# EAGLE board damp_orig (EAGLE 6.4)
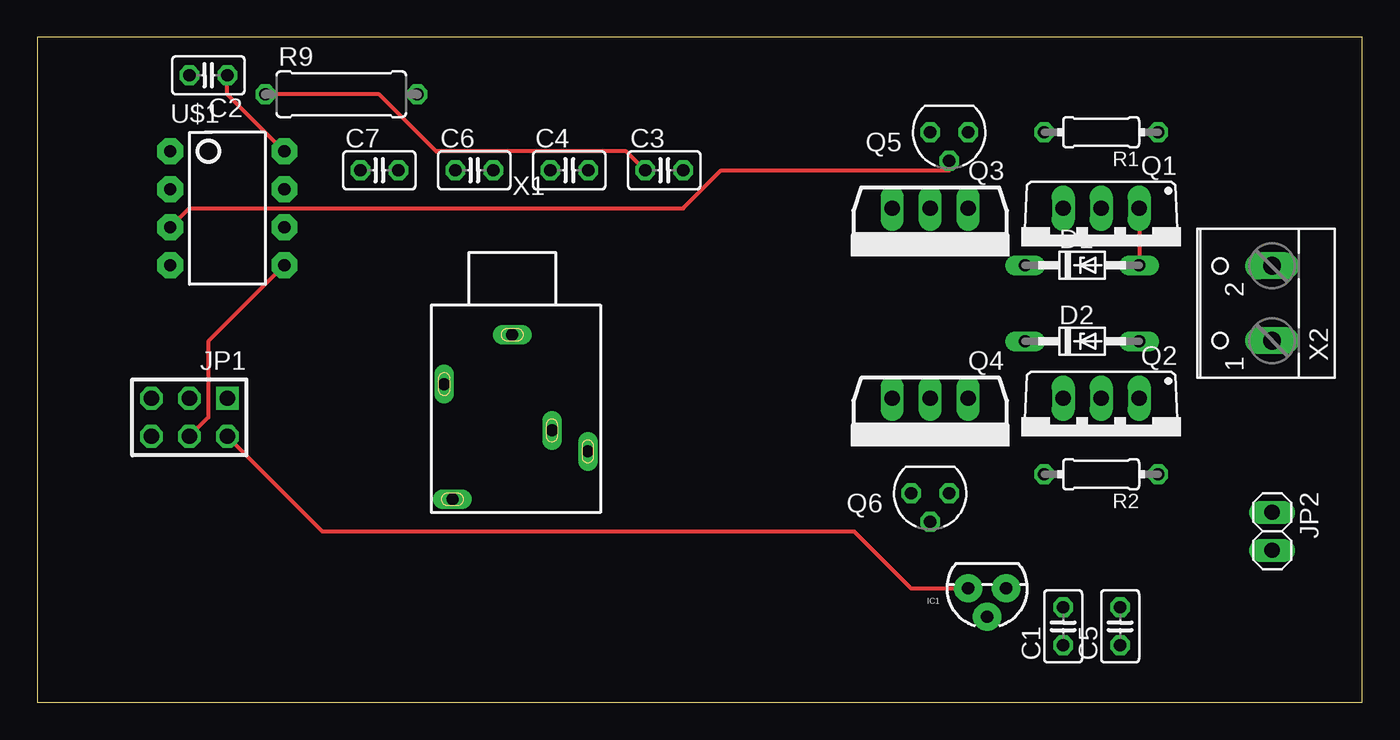
[diagram p0: board, top side]
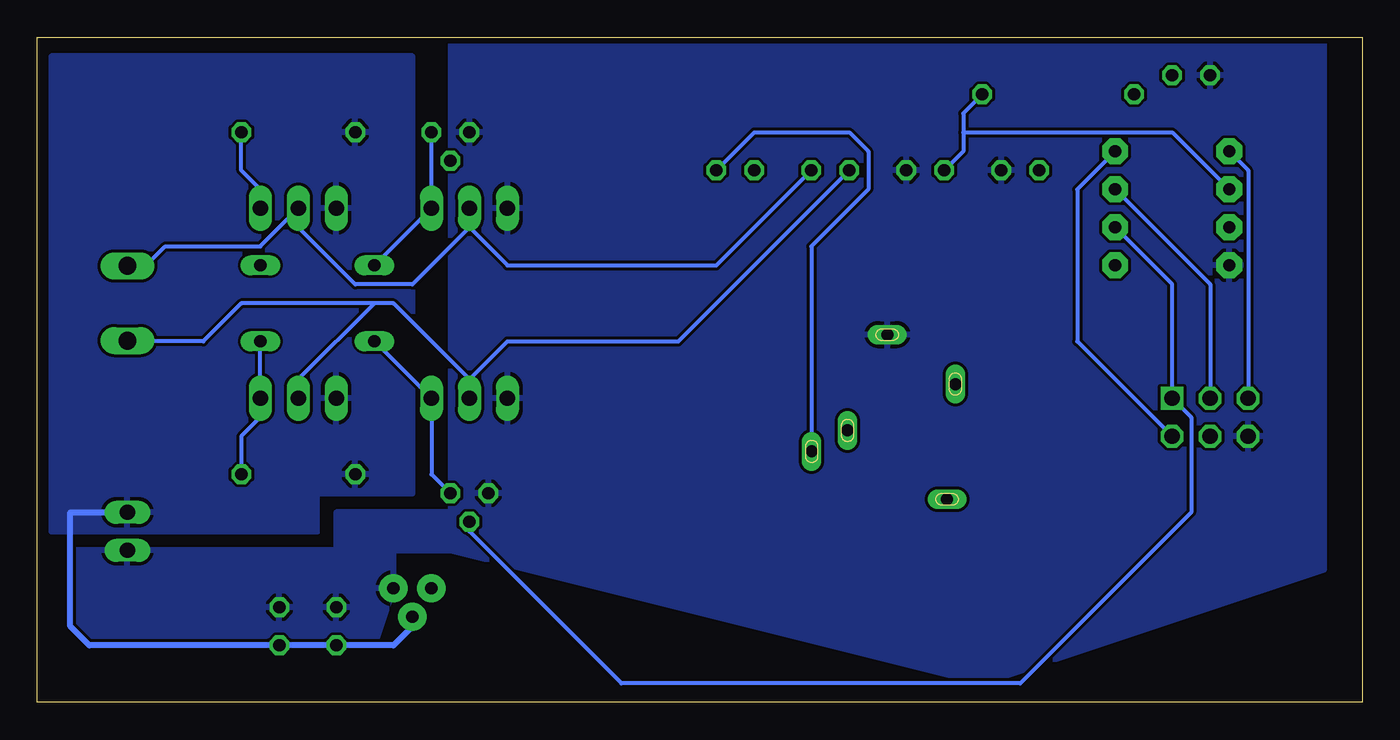
[diagram p1: board, bottom side, seen from below]

Size 88.57 x 44.44 mm. Coordinates in mm from the lower left corner, seen from the top.
Outline: 0,0 88.57,0 88.57,44.44 0,44.44 0,0
Copper layers (1*16): Top 0.035mm / dielectric 1.5mm / Bottom 0.035mm
Design rules "default *": minimum track width 10mil, minimum drill 24mil, track to track 0.2mm, track to pad 0.2mm, pad to pad 0.2mm, via to via 0.2mm, smd to smd 0.2mm, copper to edge 0.4mm, drill to drill 0.4mm, minimum pad ring 10mil, minimum via ring 8mil, stop-mask expansion 4mil, vias tented up to drill 0mil, thermal gap 10mil
Net classes: 1 Power: width 0.508 mm

## Footprints (pad centres in the part's own frame; a part is rotated, then mirrored left to right if it is on the bottom)
C025-025X050 = drill 0.813 octagon: 1 -1.27,0; 2 1.27,0
DO34Z7 = drill 0.813 long: A 3.81,0; C -3.81,0
TO-92 = drill 0.813 pad 1.88: 1 -1.27,0; 2 0,1.905; 3 1.27,0
AVR-ISP-6 = drill 1.016 square: 1 -2.54,-1.27 | drill 1.016 octagon: 2 -2.54,1.27; 3 0,-1.27; 4 0,1.27; 5 2.54,-1.27; 6 2.54,1.27
1X02 = drill 1.016 long: 1 -1.27,0; 2 1.27,0
TO220BV = drill 1.016 long: D 0,-2.54; G -2.54,-2.54; S 2.54,-2.54
TO262-V = drill 1.016 long: 1 -2.54,0; 2 0,0; 3 2.54,0
SOT54E = drill 0.813 octagon: D -1.27,0; G 0,1.905; S 1.27,0
0204/7 = drill 0.813 octagon: 1 -3.81,0; 2 3.81,0
0309/10 = drill 0.813 octagon: 1 -5.08,0; 2 5.08,0
DIP08 = drill 0.813 pad 1.727 octagon: 1 -3.81,-3.81; 2 -1.27,-3.81; 3 1.27,-3.81; 4 3.81,-3.81; 5 3.81,3.81; 6 1.27,3.81; 7 -1.27,3.81; 8 -3.81,3.81
1503_09 = drill 0.8 pad 1.2 long: 1 0,-2.1; 2 -4.55,-5.4; 3 5.05,-9.9; 4 -4,-13.1; 5 2.65,-8.5
W237-102 = drill 1.194 long: 1 -2.5,-1.27; 2 2.5,-1.27

## Placement (x,y rotation side)
C1  100nF  [C025-025X050]  68.58,5.08 90 top
C2  100nF  [C025-025X050]  11.43,41.91 180 top
C3  10uF  [C025-025X050]  41.91,35.56 0 top
C4  47nF  [C025-025X050]  35.56,35.56 0 top
C5  330uF  [C025-025X050]  72.39,5.08 90 top
C6  1nF  [C025-025X050]  29.21,35.56 0 top
C7  47nF  [C025-025X050]  22.86,35.56 0 top
D1  BZX90  [DO34Z7]  69.85,29.21 0 top
D2  BZX90  [DO34Z7]  69.85,24.13 0 top
IC1  78L33 or 7805  [TO-92]  63.5,7.62 180 top
JP1  AVR-ISP-6VERT  [AVR-ISP-6]  10.16,19.05 180 top
JP2  [1X02]  82.55,11.43 270 top
Q1  IRF9Z14  [TO220BV]  71.12,30.48 180 top
Q2  IRF9Z14  [TO220BV]  71.12,17.78 180 top
Q3  IRFZ14  [TO262-V]  59.69,33.02 180 top
Q4  IRFZ14  [TO262-V]  59.69,20.32 180 top
Q5  BS170  [SOT54E]  60.96,38.1 180 top
Q6  BS170  [SOT54E]  59.69,13.97 180 top
R1  1k  [0204/7]  71.12,38.1 180 top
R2  1k  [0204/7]  71.12,15.24 180 top
R9  10k  [0309/10]  20.32,40.64 0 top
U$1  ATTINY45DIP8  [DIP08]  12.7,33.02 270 top
X1  1503_09  [1503_09]  31.75,26.67 0 top
X2  [W237-102]  81.28,26.67 90 top

## Library data of the parts
C1-C7 R1 R2 R9 = rcl
D1 D2 = diode
IC1 U$1 = SparkFun
JP1 = avr-7
JP2 = pinhead
Q1-Q4 = transistor-power
Q5 Q6 = transistor-small-signal
X1 = con-lumberg
X2 = con-wago-500; MPN: 237-102; OC_FARNELL: unknown; OC_NEWARK: 70K9898

## Nets
+12V: C1.1 C5.1 IC1.2 JP2.1 Q1.S Q2.S R1.2 R2.2
GND: C1.2 C2.2 C5.2 C6.2 C7.2 IC1.1 JP1.6 JP2.2 Q3.3 Q4.3 Q5.S Q6.S U$1.4 X1.1
N$1: D1.A Q1.G R1.1
N$2: D2.A Q2.G R2.1
N$3: C4.2 Q1.D Q3.2 X2.2
N$4: JP1.5 U$1.1
N$5: C4.1 Q2.D Q4.2 X2.1
N$7: D1.C Q3.1 Q5.D
N$8: D2.C Q4.1 Q6.D
N$10: C6.1 R9.2 U$1.2
N$11: JP1.4 U$1.5
N$12: C2.1 IC1.3 JP1.2 U$1.8
N$13: JP1.1 Q6.G U$1.6
N$14: JP1.3 U$1.7
N$15: C3.1 R9.1
N$18: Q5.G U$1.3
N$19: C7.1
N$23: C3.2 X1.3

## Tracks (layer width: path | path; a pad name or v marks a point on that pad's centre or on a via)
+12V
  Bottom 0.406: IC1.2 63.5,5.08 64.77,3.81 C1.1 C5.1 85.09,3.81 86.36,5.08 86.36,12.7 JP2.1
  pour Bottom: 63.5,43.18 87.63,43.18 87.63,11.43 69.85,11.43 69.85,13.97 63.5,13.97
GND
  pour Bottom: 2.54,77.47 60.96,44.45 60.96,12.7 68.58,12.7 68.58,10.16 86.36,10.16 86.36,3.81 66.04,3.81 64.77,7.62 64.77,10.16 60.96,10.16 25.4,1.27 2.54,8.89
N$1
  Top 0.254: Q1.G D1.A
  Bottom 0.254: R1.1 74.93,35.56 73.66,34.29 Q1.G
N$2
  Bottom 0.254: R2.1 74.93,17.78 73.66,19.05 Q2.G D2.A
N$3
  Bottom 0.254: X2.2 82.55,29.21 81.28,29.21 80.01,30.48 73.66,30.48 Q1.D 71.12,31.75 67.31,27.94 63.5,27.94 59.69,31.75 | C4.2 43.18,29.21 57.15,29.21 59.69,31.75 | 59.69,31.75 Q3.2
N$4
  Bottom 0.254: JP1.5 7.62,35.56 U$1.1
N$5
  Bottom 0.254: C4.1 45.72,24.13 57.15,24.13 59.69,21.59 | Q2.D 71.12,21.59 66.04,26.67 | 66.04,26.67 64.77,26.67 59.69,21.59 | 59.69,21.59 Q4.2 | 66.04,26.67 74.93,26.67 77.47,24.13 82.55,24.13 X2.1
N$7
  Bottom 0.254: D1.C Q3.1 Q5.D
N$8
  Bottom 0.254: Q6.D 62.23,15.24 Q4.1 D2.C
N$10
  Bottom 0.254: C6.1 26.67,36.83 26.67,38.1 | 26.67,38.1 26.67,39.37 R9.2 | U$1.2 12.7,38.1 26.67,38.1
N$11
  Top 0.254: JP1.4 11.43,19.05 11.43,24.13 U$1.5
N$12
  Top 0.254: C2.1 12.7,40.64 U$1.8 | IC1.3 58.42,7.62 54.61,11.43 19.05,11.43 JP1.2
  Bottom 0.254: JP1.2 19.05,24.13 19.05,34.29 U$1.8
N$13
  Bottom 0.254: Q6.G 59.69,11.43 49.53,1.27 22.86,1.27 11.43,12.7 11.43,19.05 JP1.1 12.7,27.94 U$1.6
N$14
  Bottom 0.254: JP1.3 10.16,27.94 U$1.7
N$15
  Top 0.254: R9.1 22.86,40.64 26.67,36.83 39.37,36.83 C3.1
N$18
  Top 0.254: U$1.3 10.16,33.02 43.18,33.02 45.72,35.56 60.96,35.56 Q5.G
N$23
  Bottom 0.254: C3.2 40.64,38.1 34.29,38.1 33.02,36.83 33.02,34.29 36.83,30.48 36.83,17.78 X1.3